# EAGLE board PowerSource (EAGLE 9.1.3)
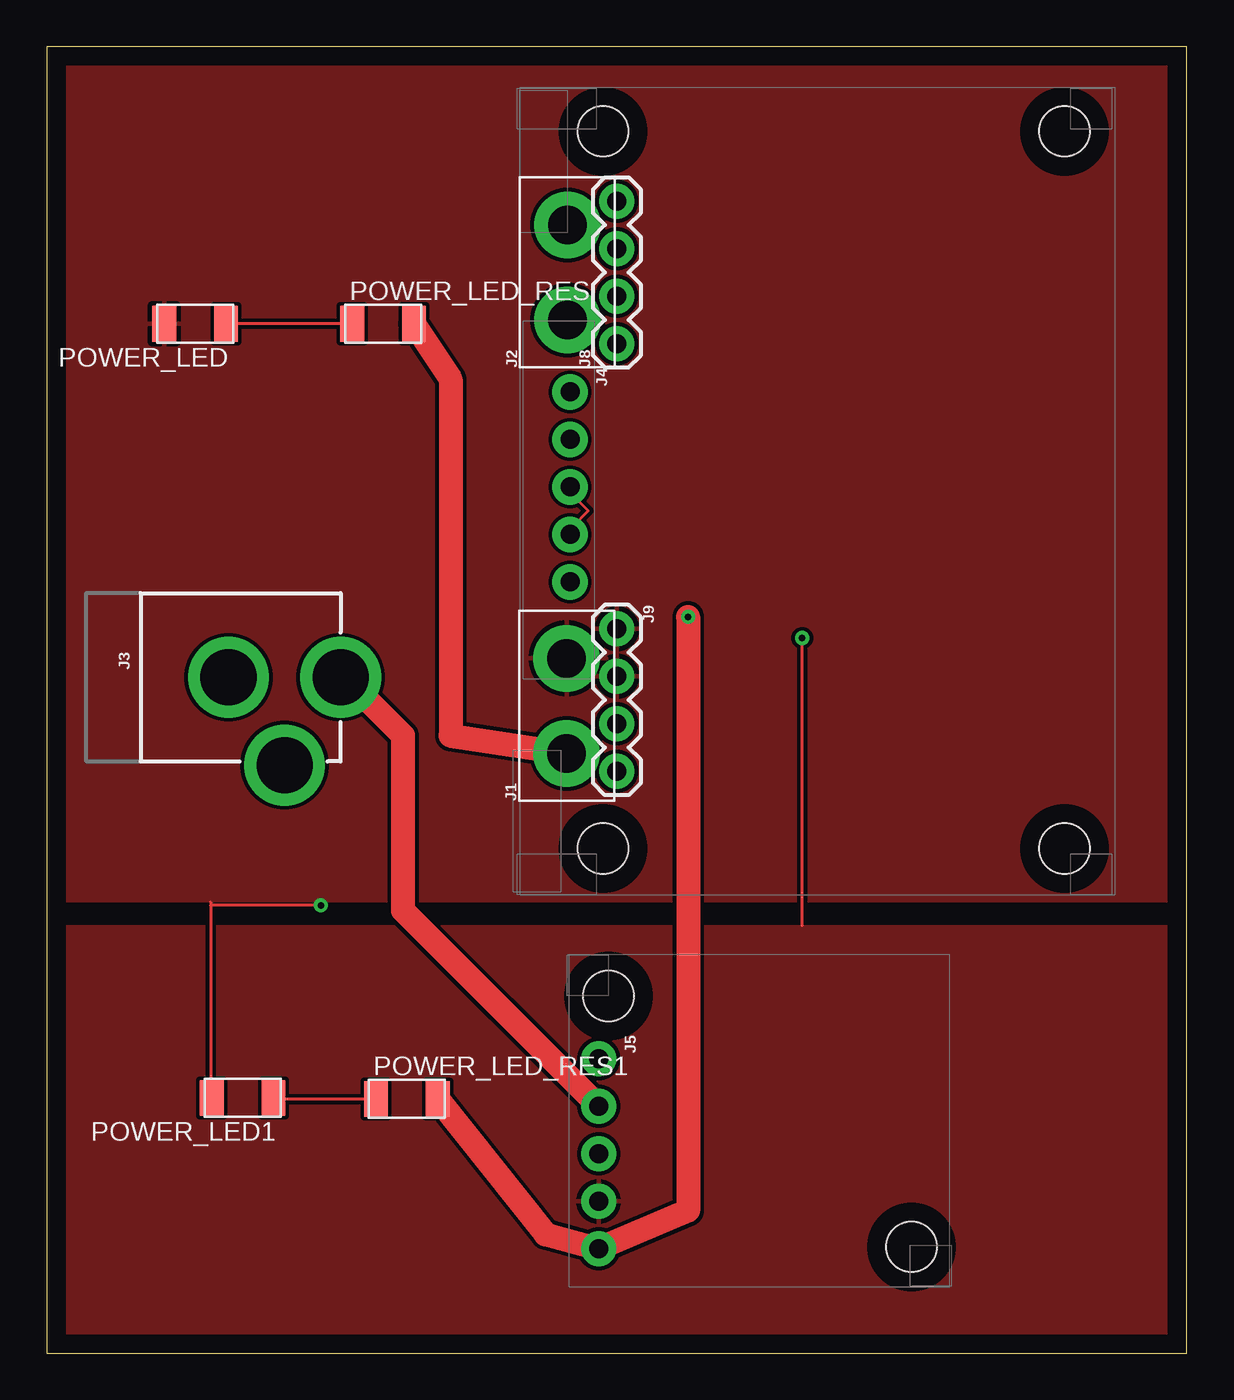
[diagram p0: board, top side]
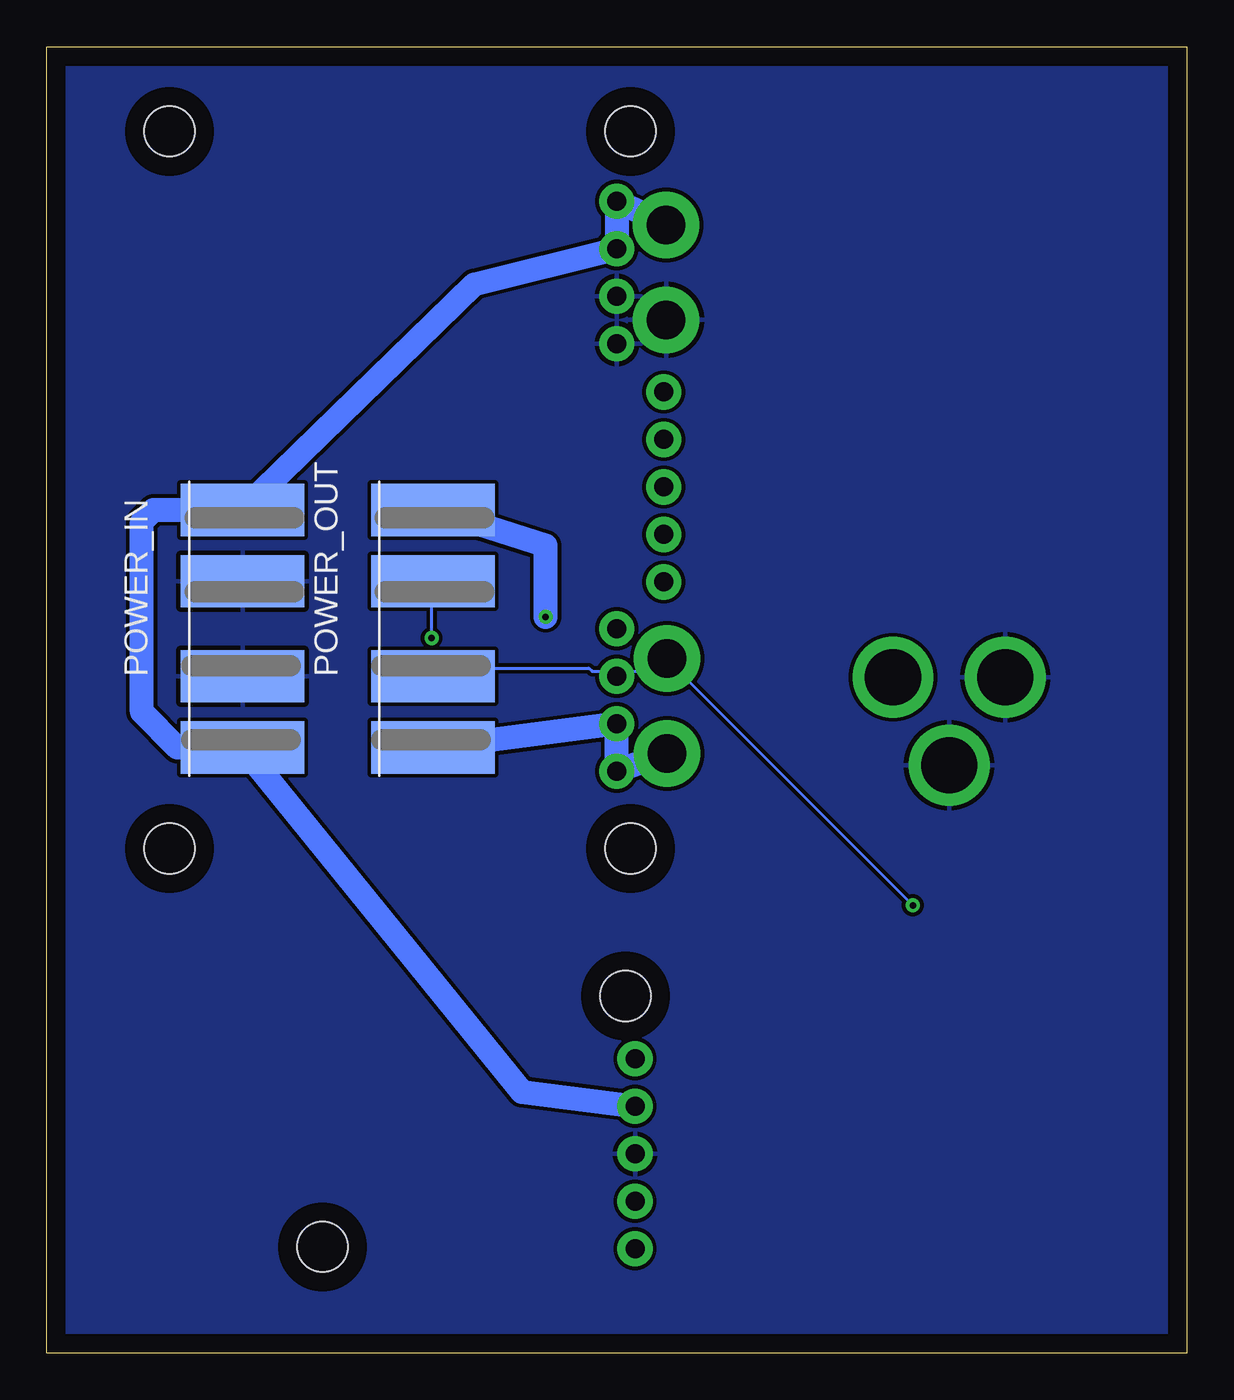
[diagram p1: board, bottom side, seen from below]

Size 60.96 x 69.85 mm. Coordinates in mm from the lower left corner, seen from the top.
Outline: 60.96,0 60.96,69.85 0,69.85 0,0 60.96,0
Copper layers (1*16): Top 0.035mm / dielectric 1.5mm / Bottom 0.035mm
Design rules "default": minimum track width 6mil, minimum drill 0.35mm, track to track 6mil, track to pad 6mil, pad to pad 6mil, via to via 6mil, smd to smd 6mil, copper to edge 40mil, drill to drill 6mil, minimum pad ring 10mil, minimum via ring 8mil, stop-mask expansion 4mil, vias tented up to drill 0mil, thermal gap 10mil
Net classes: 0 default: clearance 0.205 mm
Holes 2.7 mm at 30.03,19.09 46.23,5.69 29.74,65.33 29.74,26.99 54.41,26.99 54.41,65.33

## Footprints (pad centres in the part's own frame; a part is rotated, then mirrored left to right if it is on the bottom)
1X02_XTRA_BIG = drill 2.057 pad 3.556: 1 -2.54,0; 2 2.54,0
POWER_JACK_PTH = drill 2.997 pad 4.318: GND 0,7.7; GNDBREAK 4.7,10.7; PWR 0,13.7
1X05_NO_SILK = drill 1.016 pad 1.88: 1 0,0; 2 2.54,0; 3 5.08,0; 4 7.62,0; 5 10.16,0
1X04 = drill 1.016 pad 1.88: 1 0,0; 2 2.54,0; 3 5.08,0; 4 7.62,0
MOLEX4015 = smd 2.794 x 6.604: GND_01 -2.54,3.81; GND_02 2.54,3.81; VCC_01 -6.35,3.81; VCC_02 6.35,3.81
LED1206FAB = smd 1.27 x 1.905: 1 -1.651,0; 2 1.651,0
R1206FAB = smd 1.27 x 1.905: 1 -1.651,0; 2 1.651,0

## Placement (x,y rotation side)
J1  [1X02_XTRA_BIG]  27.79,34.61 90 top
J2  [1X02_XTRA_BIG]  27.84,57.78 90 top
J3  POWER_JACK  [POWER_JACK_PTH]  2.02,36.14 270 top
J4  [1X05_NO_SILK]  27.98,51.4 270 top
J5  [1X05_NO_SILK]  29.51,15.74 270 top
J8  [1X04]  30.48,53.98 90 top
J9  [1X04]  30.48,38.73 270 top
POWER_IN  MOLEX4015  [MOLEX4015]  46.67,38.73 90 bottom
POWER_LED  LEDFAB1206  [LED1206FAB]  7.94,55.04 180 top
POWER_LED1  LEDFAB1206  [LED1206FAB]  10.48,13.65 180 top
POWER_LED_RES  500  [R1206FAB]  17.98,55.04 0 top
POWER_LED_RES1  500  [R1206FAB]  19.25,13.6 0 top
POWER_OUT  MOLEX4015  [MOLEX4015]  36.51,38.73 90 bottom

## Library data of the parts
J1 J2 J4 J5 = SparkFun-Connectors
J3 = SparkFun-Connectors; PROD_ID: CONN-08197
J8 J9 = SparkFun-Connectors; PROD_ID: CONN-09696
POWER_IN POWER_OUT = MOLEX4015
POWER_LED POWER_LED1 POWER_LED_RES POWER_LED_RES1 = fab

## Nets
EN_M: J4.5
EN_MCU: J5.1
GND: J4.3 J4.4
GND_IN: J2.1 J3.GND J3.GNDBREAK J5.3 J8.1 J8.2 POWER_IN.GND_01 POWER_IN.GND_02
GND_M: J1.2 J9.1 J9.2 POWER_LED1.2 POWER_LED.2 POWER_OUT.GND_01
GND_MCU: J5.4 POWER_OUT.GND_02
MOD: J4.2
N$22: POWER_LED.1 POWER_LED_RES.1
N$23: POWER_LED1.1 POWER_LED_RES1.1
PG: J4.1
VCC_IN: J2.2 J3.PWR J5.2 J8.3 J8.4 POWER_IN.VCC_01 POWER_IN.VCC_02
VCC_M: J1.1 J9.3 J9.4 POWER_LED_RES.2 POWER_OUT.VCC_01
VCC_MCU: J5.5 POWER_LED_RES1.2 POWER_OUT.VCC_02

## Tracks (layer width: path | path; a pad name or v marks a point on that pad's centre or on a via)
GND
  Top 0.152: J4.4 28.06,43.78 28.06,44.14 28.95,45.03 28.06,45.93 28.06,46.28 J4.3
GND_IN
  pour Bottom: 0,69.85 60.96,69.85 60.96,0 0,0
GND_M  (via drill 0.35)
  Top 0.152: 8.76,23.95 8.76,24.12 8.76,24.13 | 8.76,23.95 8.76,13.76 POWER_LED1.2 | v14.65,23.95 8.76,23.95
  Bottom 0.152: v14.65,23.95 27.16,36.45 31.81,36.45 31.99,36.63 39.85,36.63 40.21,36.28 POWER_OUT.GND_01
  pour Top: 0,69.85 60.96,69.85 60.96,24.13 0,24.13
GND_MCU  (via drill 0.35)
  Top 0.152: v40.39,38.24 40.39,22.87 40.39,22.86
  Bottom 0.152: v40.39,38.24 40.39,41.1 POWER_OUT.GND_02
  pour Top: 0,22.86 60.96,22.86 60.96,0 0,0
N$22
  Top 0.152: POWER_LED.1 9.65,55.04 16.26,55.04 POWER_LED_RES.1
N$23
  Top 0.152: POWER_LED1.1 12.15,13.58 17.51,13.58 POWER_LED_RES1.1
VCC_IN
  Top 1.27: J5.2 19.05,23.66 19.05,33.02 15.93,36.14 J3.PWR
  Bottom 0.152: 48.78,31.27 POWER_IN.VCC_01 | 48.78,45.93 POWER_IN.VCC_02
  Bottom 1.27: J5.2 35.56,13.97 POWER_IN.VCC_01 53.98,32.38 55.88,34.29 55.88,44.45 55.24,45.09 POWER_IN.VCC_02 38.1,57.15 J8.3 J8.4 J2.2
VCC_M
  Top 1.27: POWER_LED_RES.2 21.59,52.07 21.59,33.02 J1.1
  Bottom 1.27: J1.1 J9.4 J9.3 POWER_OUT.VCC_01
VCC_MCU  (via drill 0.35)
  Top 1.27: v34.29,39.37 34.29,7.62 J5.5 26.67,6.35 POWER_LED_RES1.2
  Bottom 1.27: v34.29,39.37 34.29,43.18 POWER_OUT.VCC_02